# Altium PCB PCB1.PcbDoc (part 3 of 3)
Units mm, origin at the board's own origin, x right, y up, seen from the top; angles counter-clockwise.
Board outline 100 x 60 mm, 4 copper layers (Top Layer, GND, POWER, Bottom Layer), stack 1.592 mm thick; 134 components, 201 nets, 911 pads, 539 vias.
Unrouted connection lines stored in the file: 3.
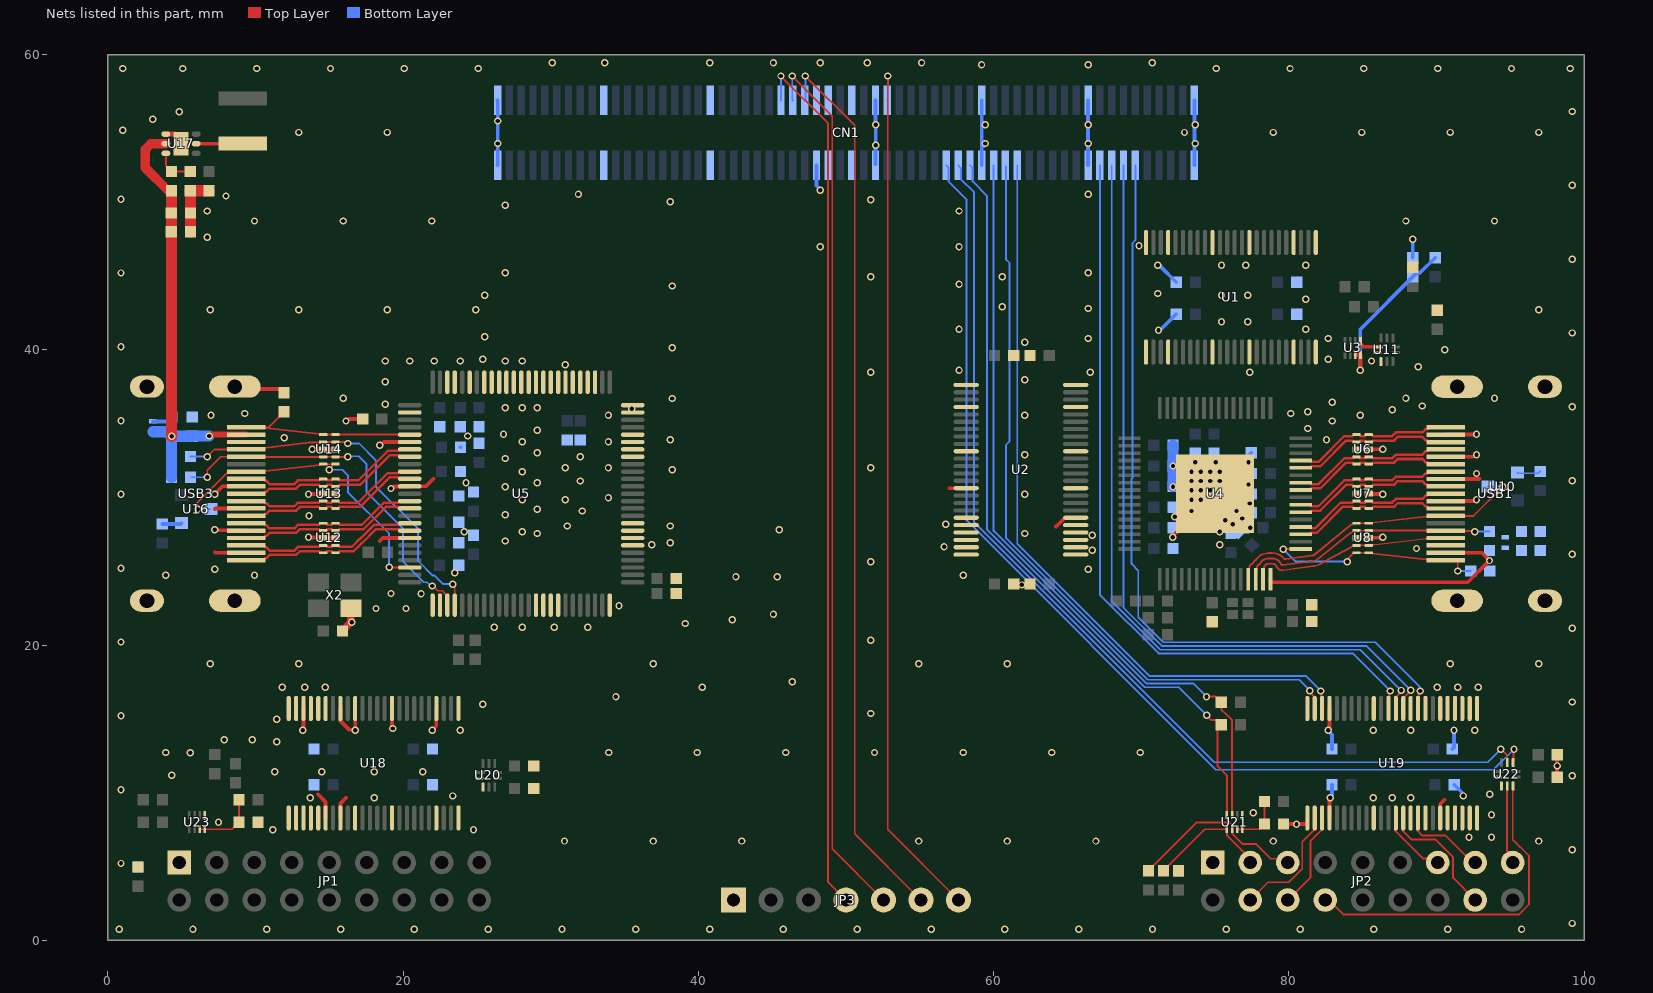
[diagram p5: the nets of this part, all layers, seen from the top]

## Via types
v1: diameter 0.5, hole 0.3, Top Layer to Bottom Layer, tented top, 493 vias
v2: diameter 0.5, hole 0.3, Top Layer to Bottom Layer, 46 vias

## Nets (pads, with @x,y where several pads share a name; then routed paths per layer and width w, separated by ;. In a path a pad name is that pad's centre, name@x,y a point inside that pad or via, vN(x,y) a via of type N, cw(c..) or ccw(c..) an arc to the next point about the centre after c; other vN are vias at no path point) (continued)
CAM2_D5_1V8: CN1.17 U19.37 | length 52.7
  Top Layer w0.127: U19.37@86.751,15.708 86.78,15.738 86.78,16.716 86.868,16.804 v1(86.868,16.891)
  Bottom Layer w0.127: CN1.17@67.201,52.497 67.201,23.408 71.178,19.431 84.328,19.431 v1(86.868,16.891)
CAM2_D6: JP2.13 U19.13 | length 4.6
  Top Layer w0.127: U19.13@87.244,8.23 87.18,8.166 87.18,7.449 89.077,5.552 89.798,5.552 JP2.13@90.08,5.27
CAM2_D6_1V8: CN1.15 U19.36 | length 53
  Top Layer w0.127: U19.36@87.249,15.708 87.249,16.467 87.621,16.839 v1(87.621,16.926)
  Bottom Layer w0.127: CN1.15@67.998,52.497 67.998,22.97 71.283,19.685 84.836,19.685 87.595,16.926 v1(87.621,16.926)
CAM2_D7: JP2.16 U19.14 | length 8.5
  Top Layer w0.127: U19.14@87.744,8.23 87.681,8.166 87.681,7.449 88.291,6.838 89.912,6.838 91.125,5.626 91.125,4.225 JP2.16@92.62,2.73
CAM2_D7_1V8: CN1.13 U19.35 | length 53.2
  Top Layer w0.127: U19.35@87.749,15.708 87.749,16.401 88.267,16.919 v1(88.267,16.942)
  Bottom Layer w0.127: CN1.13@68.799,52.497 68.799,22.529 71.388,19.939 85.244,19.939 88.241,16.942 v1(88.267,16.942)
CAM2_HREF: JP2.6 U19.3 | length 6.5
  Top Layer w0.127: JP2.6@79.92,2.73 81.469,4.279 81.469,6.736 82.245,7.512 U19.3@82.245,8.23
CAM2_HREF_1V8: CN1.31 U19.46 | length 51.6
  Top Layer w0.127: v1(82.169,16.891) 82.221,16.839 82.221,15.738 U19.46@82.25,15.708
  Bottom Layer w0.127: CN1.31@61.6,52.497 61.6,26.853 70.547,17.907 81.153,17.907 v1(82.169,16.891)
CAM2_PCLK: JP2.15 U19.16 | length 5.6
  Top Layer w0.127: U19.16@88.745,8.23 88.682,8.166 88.682,7.449 89.038,7.092 90.63,7.092 92.452,5.27 JP2.15@92.62,5.27
CAM2_PCLK_1V8: CN1.11 U19.33 | length 53.5
  Top Layer w0.127: U19.33@88.75,15.708 88.779,15.738 88.779,16.683 88.9,16.804 v1(88.9,16.891)
  Bottom Layer w0.127: CN1.11@69.599,52.497 69.599,47.424 69.407,47.232 69.407,31.316 69.342,31.251 69.342,25.496 69.797,25.041 69.797,21.889 71.494,20.193 85.852,20.193 88.843,17.202 88.843,16.948 v1(88.9,16.891)
CAM2_PWDN: JP2.17 U22.4 | length 5.4
  Top Layer w0.127: U22.4@94.792,10.449 94.767,10.424 94.767,6.062 95.16,5.669 JP2.17@95.16,5.27
CAM2_PWDN_1V8: CN1.41 U22.9 | length 68.5
  Top Layer w0.127: v1(94.361,12.954) 94.756,12.559 94.756,12.086 U22.9@94.792,12.049
  Bottom Layer w0.127: CN1.41@57.6,52.497 57.786,52.31 57.786,51.561 58.674,50.673 58.674,28.321 74.93,12.065 93.472,12.065 v1(94.361,12.954)
CAM2_RST: JP2.8 U22.5 | length 23.1
  Top Layer w0.127: JP2.8@82.46,2.984 83.705,1.739 95.57,1.739 96.266,2.435 96.266,5.715 95.167,6.814 95.167,10.424 U22.5@95.192,10.449
CAM2_RST_1V8: CN1.43 U22.8 | length 70.2
  Top Layer w0.127: U22.8@95.192,12.049 95.221,12.078 95.221,12.925 v1(95.25,12.954)
  Bottom Layer w0.127: CN1.43@56.8,52.497 56.949,52.347 56.949,51.382 58.166,50.165 58.166,28.448 75.057,11.557 93.853,11.557 v1(95.25,12.954)
CAM2_SCL: JP2.3 R27.1 U21.5 | length 8.1
  Top Layer w0.127: R27.1@71.501,4.714 71.818,5.032 71.818,5.047 74.291,7.52 U21.5@75.801,7.52 75.801,7.103 JP2.3@77.38,5.524
CAM2_SCL_1V8: CN1.39 R28.2 U21.4 | length 53
  Top Layer w0.127: v1(74.437,15.24) 74.755,14.923 75.106,14.923 R28.2@75.423,14.605 75.169,14.351 75.169,11.801 75.801,11.169 U21.4@75.801,8.48
  Bottom Layer w0.127: CN1.39@58.4,52.497 58.575,52.321 58.575,51.407 59.563,50.419 59.563,27.813 70.231,17.145 72.532,17.145 v1(74.437,15.24)
CAM2_SDA: JP2.5 R25.1 U21.6 | length 12.1
  Top Layer w0.127: R25.1@70.485,4.714 70.802,5.032 70.802,5.047 73.731,7.976 75.968,7.976 76.128,7.816 76.128,7.544 76.176,7.496 76.176,7.224 76.885,6.515 77.79,6.515 78.781,5.524 JP2.5@79.92,5.524
CAM2_SDA_1V8: CN1.35 R26.2 U21.3 | length 52.9
  Top Layer w0.127: v1@74.425,16.507 75.031,16.507 75.091,16.447 75.106,16.447 75.428,16.125 75.428,15.632 75.748,15.311 76.152,14.908 76.152,14.145 U21.3@76.152,8.48
  Bottom Layer w0.127: CN1.35@60,52.497 60,27.735 70.336,17.399 73.533,17.399 v1(74.422,16.51)
CAM2_VS: JP2.4 U19.2 | length 8.1
  Top Layer w0.127: JP2.4@77.38,2.73 78.586,3.936 79.987,3.936 80.911,4.86 80.911,6.678 81.745,7.512 U19.2@81.745,8.23
CAM2_VS_1v8: CN1.33 U19.47 | length 51.6
  Top Layer w0.127: v1(81.415,16.915) 81.415,16.814 81.549,16.681 81.549,16.668 81.75,16.467 U19.47@81.75,15.708
  Bottom Layer w0.127: CN1.33@60.833,52.428 60.833,46.137 61.087,45.883 61.087,33.807 60.833,33.553 60.833,27.261 70.441,17.653 80.69,17.653 81.415,16.928 v1(81.415,16.915)
GND: C1.1 C2.1 C3.2 C4.2 C5.1 C6.2 C7.1 C8.2 C9.1 C10.1 C11.1 C12.2 C13.1 C14.2 C15.1 C16.1 C17.2 C18.2 C19.2 C20.1 C21.2 C22.1 C23.2 C24.2 C25.2 C26.2 C27.2 C28.2 C29.2 C30.2 C31.2 C32.2 C33.2 C34.1 C35.1 C36.2 C37.1 C38.2 C39.1 C40.2 C41.1 C42.2 C43.1 C44.1 C45.2 C46.2 C47.2 C48.2 C49.1 C50.1 C51.1 C52.2 C53.1 C54.2 C55.2 C56.2 C57.2 C58.2 C59.1 C60.2 C61.2 C62.1 C63.2 C64.1 C65.2 C66.2 C67.1 C68.2 C69.2 CN1.1 CN1.2 CN1.19 CN1.20 CN1.37 CN1.38 CN1.55 CN1.56 CN1.65 CN1.66 CN1.83 CN1.84 CN1.101 CN1.102 CN1.119 CN1.120 JP1.1 JP2.1 JP3.1 R1.2 R13.1 R14.1 R16.1 R23.1 U1.1 U1.4 U1.10 U1.15 U1.21 U1.24 U1.25 U1.28 U1.34 U1.39 U1.45 U1.48 U2.1 U2.2 U2.3 U2.4 U2.5 U2.6 U2.10 U2.15 U2.21 U2.24 U2.25 U2.28 U2.34 U2.39 U2.43 U2.44 U2.45 U2.46 U2.47 U2.48 U3.1 U4.65 U5.3 U5.4 U5.5 U5.6 U5.7 U5.8 U5.9 U5.10 U5.11 U5.12 U5.13 U5.14 U5.15 U5.16 U5.17 U5.18 U5.20 U5.22 U5.23 U5.27 U5.31 U5.37 U5.44 U5.51 U5.52 U5.65 U5.66 U5.67 U5.68 U5.75 U5.81 U5.82 U5.83 U5.84 U5.93 U5.94 U5.95 U5.96 U5.99 U5.100 U6.3 U6.8 U7.3 U7.8 U8.3 U8.8 U9.2 U11.1 U11.2 U11.3 U12.3 U12.8 U13.3 U13.8 U14.3 U14.8 U15.2 U17.1 U17.7 U18.1 U18.2 U18.3 U18.4 U18.5 U18.6 U18.8 U18.10 U18.15 U18.21 U18.24 U18.25 U18.28 U18.34 U18.39 U18.41 U18.43 U18.44 U18.45 U18.46 U18.47 U18.48 U19.1 U19.4 U19.10 U19.15 U19.17 U19.19 U19.20 U19.21 U19.22 U19.23 U19.24 U19.25 U19.26 U19.27 U19.28 U19.29 U19.30 U19.32 U19.34 U19.39 U19.45 U19.48 U20.2 U20.3 U21.1 U22.2 U22.3 U23.1 USB1.2 USB1.5 USB1.8 USB1.11 USB1.17 USB1.20 USB1.21 USB1.22 USB1.23 USB3.2 USB3.5 USB3.8 USB3.11 USB3.17 USB3.20 USB3.21 USB3.22 USB3.23 X2.2 | length 115.9
  Top Layer w0.127: JP1.1@4.284,4.968 JP1.1@4.84,5.524
  Top Layer w0.254: U17.7@4.58,54.614 4.953,54.24 U17.7@4.953,53.964 ; 7.239,26.289 7.272,26.256 USB3.2@9.36,26.256 ; v1(7.239,27.813) 7.274,27.778 9.338,27.778 USB3.5@9.36,27.755 ; 7.239,29.21 7.285,29.256 USB3.8@9.36,29.256 ; v1(7.239,30.226) 7.767,30.754 USB3.11@9.36,30.754 ; USB3.20@8.601,37.506 8.754,37.353 11.684,37.353 R14.1@11.938,37.099 ; v1(13.208,14.224) 13.245,14.261 13.245,15.704 U18.46@13.25,15.708 ; v1(13.589,27.305) 13.614,27.28 14.557,27.28 U12.8@14.583,27.254 U12.3@15.418,27.254 ; v1(13.589,30.226) 13.603,30.24 14.569,30.24 U13.8@14.583,30.254 ; v1(13.843,33.274) 13.853,33.264 14.573,33.264 U14.8@14.583,33.254 U14.3@15.418,33.254 ; 14.224,9.891 14.746,9.368 14.746,8.296 U18.6@14.751,8.292 ; U18.8@15.75,8.292 15.754,8.296 15.754,9.277 16.129,9.652 ; U18.41@15.75,15.708 15.754,15.704 15.754,14.853 16.336,14.271 16.717,14.271 v1(16.764,14.224) 16.755,14.233 16.755,15.704 U18.39@16.75,15.708 ; v1(16.129,35.179) 16.196,35.179 16.322,35.306 R13.1@17.257,35.306 ; 18.415,27.051 18.618,27.254 U5.44@20.449,27.254 ; v1(18.415,33.528) 18.482,33.528 18.708,33.754 U5.31@20.449,33.754 ; v1(19.177,30.607) 19.244,30.607 19.382,30.746 20.44,30.746 U5.37@20.449,30.754 20.457,30.763 21.541,30.763 22.052,31.273 ; U18.34@19.25,15.708 19.25,14.458 19.304,14.404 v1(19.304,14.351) ; v1(21.971,14.224) 22.249,14.502 U18.28@22.249,15.708 ; 57.002,30.616 57.286,30.616 57.292,30.622 58.136,30.622 U2.39@58.141,30.627 ; C8.2@61.356,24.13 61.413,24.073 v1(61.919,24.073) ; v1@61.919,24.13 61.976,24.073 62.411,24.073 C7.1@62.469,24.13 ; 64.226,28.033 64.244,28.033 64.84,28.628 U2.6@65.557,28.628 ; v1(72.136,27.305) 72.183,27.352 72.183,27.437 73.406,28.66 v1(73.406,29.083) 74.041,29.718 v1(74.041,29.845) 74.045,29.849 74.123,29.849 74.676,30.402 v1(74.676,30.48) 74.139,31.017 74.139,31.115 v1(73.406,31.115) 73.025,30.734 v1(72.151,30.734) ; C64.1@79.644,7.874 v1(80.518,7.874) 81.238,7.874 81.249,7.886 U19.1@81.249,8.292 ; v1(82.677,14.224) 82.677,14.277 82.751,14.351 U19.45@82.751,15.708 ; U19.4@82.751,8.292 82.751,9.546 82.804,9.599 v1(82.804,9.652) ; U3.1@84.855,40.404 85.054,40.205 U11.1@86.039,40.205 ; U8.3@85.417,27.254 85.438,27.274 86.329,27.274 v1(86.36,27.305) ; U7.3@85.417,30.254 85.434,30.238 86.348,30.238 v1(86.36,30.226) ; U6.3@85.417,33.254 85.426,33.263 86.349,33.263 v1(86.36,33.274) ; U19.19@90.251,8.292 90.256,8.296 90.256,9.23 90.551,9.525 ; USB1.11@90.64,29.754 92.552,29.754 92.643,29.845 v1(92.71,29.845) ; USB1.8@90.64,31.252 92.902,31.252 92.911,31.261 ; USB1.5@90.64,32.753 92.504,32.753 92.643,32.893 v1(92.71,32.893) ; USB1.2@90.64,34.252 90.659,34.271 92.691,34.271 v1(92.71,34.29) ; C69.2@98.186,11.049 98.171,11.064 v1(98.171,11.811) 98.171,12.558 C68.2@98.186,12.573
  Top Layer w0.356: U17.1@3.924,54.614 U17.7@4.58,54.614
  Top Layer w0.508: C32.2@15.89,20.955 16.467,21.532 X2.2@16.467,22.492
  Top Layer w0.762: C49.1@5.588,47.995 5.588,50.759 R23.1@5.573,50.774 C51.1@6.858,50.773
  Bottom Layer w0.127: JP1.1@4.284,4.968 JP1.1@4.84,5.524
  Bottom Layer w0.254: U15.2@3.048,35.148 4.018,35.148 C28.2@4.318,35.448 ; C21.2@23.876,33.401 C21.2@23.891,33.401 ; CN1.119@26.401,52.497 26.408,52.504 26.408,53.967 v1(26.416,53.975) v1(26.416,55.499) 26.408,55.507 26.408,56.888 CN1.120@26.401,56.896 ; CN1.65@47.998,52.497 47.998,51.116 48.26,50.855 v1(48.26,50.8) ; CN1.55@51.999,52.568 52.005,52.573 52.005,53.842 v1(52.011,53.848) ; v1@51.999,53.848 52.011,53.86 v1(52.011,55.245) ; v1@51.999,55.245 52.005,55.251 52.005,56.89 CN1.56@51.999,56.896 ; CN1.37@59.2,52.497 CN1.38@59.2,56.896 ; 59.2,55.516 59.436,55.279 v1(59.436,55.245) ; v1@59.323,53.796 59.436,53.908 v1(59.436,53.975) ; CN1.19@66.401,52.497 CN1.20@66.401,56.896 ; v1(71.12,45.72) 71.167,45.673 71.279,45.673 C6.2@72.375,44.577 ; v1(71.167,41.322) 71.279,41.322 C5.1@72.375,42.418 ; CN1.1@73.599,52.497 CN1.2@73.599,56.896 ; v1(77.264,32.37) 77.264,32.83 C41.1@77.455,33.02 ; v1(82.677,14.224) 82.677,14.171 82.916,13.932 C61.2@82.916,12.954 ; v1(82.804,9.652) 82.804,9.705 82.916,9.817 C60.2@82.916,10.541 ; C3.2@88.392,46.243 v1(88.392,47.498) ; C63.2@91.074,12.954 91.186,13.066 v1(91.186,14.224) ; C62.1@91.201,10.541 91.783,9.959 91.783,9.817 v1(91.821,9.779)
  Bottom Layer w0.762: v1(72.151,30.734) v1(72.151,32.131) C48.2@72.151,33.528
  other v1: 0.762,0.762 5.762,0.762 10.762,0.762 15.762,0.762 20.762,0.762 25.762,0.762 30.762,0.762 35.762,0.762 40.762,0.762 45.762,0.762 50.762,0.762 55.762,0.762 60.762,0.762 65.762,0.762 70.762,0.762 75.762,0.762 80.762,0.762 85.762,0.762 90.762,0.762 95.762,0.762 99.187,1.143 0.889,5.207 99.187,6.143 92.202,6.985 93.726,6.985 11.176,7.493 24.765,7.493 7.493,8.001 93.726,8.509 77.597,8.636 13.716,9.652 18.034,9.652 85.725,9.652 86.995,9.652 88.265,9.652 23.368,9.779 93.599,9.906 0.889,10.207 99.187,11.143 4.318,11.176 11.303,11.43 14.478,11.43 18.034,11.43 21.336,11.43 5.588,12.7 11.43,13.462 7.874,13.589 9.779,13.589 23.876,14.224 85.725,14.224 88.265,14.224 92.583,14.224 11.43,14.986 0.889,15.207 51.689,15.367 25.4,16.002 99.187,16.143 34.417,16.51 11.811,17.145 13.335,17.145 14.732,17.145 40.259,17.145 90.043,17.145 91.44,17.145 92.837,17.145 46.355,17.526 0.889,20.207 51.689,20.32 99.187,21.143 26.162,21.209 28.067,21.209 30.226,21.209 32.512,21.209 39.116,21.463 16.525,21.537 42.291,21.717 45.085,22.098 18.161,22.479 20.193,22.479 34.624,22.653 21.214,23.47 19.177,23.495 42.545,24.638 45.339,24.638 23.495,24.892 7.239,25.146 66.421,25.146 0.889,25.207 51.689,25.654 99.187,26.143 66.675,26.416 88.646,26.543 56.642,26.67 36.83,26.797 75.311,26.797 38.1,26.924 26.924,27.051 66.675,27.432 29.083,27.559 62.103,27.559 24.13,27.686 28.067,27.686 75.311,27.686 45.466,27.813 77.397,27.94 31.115,28.067 38.1,28.067 56.769,28.194 76.2,28.194 75.692,28.448 76.835,28.575 72.263,28.702 13.625,28.766 26.924,28.829 32.131,29.083 76.454,29.083 29.083,29.21 77.343,29.591 28.067,29.845 30.988,29.845 73.406,29.845 33.909,29.972 0.889,30.207 62.103,30.226 73.406,30.48 74.041,30.48 26.924,30.734 77.264,30.876 24.257,30.988 29.083,30.988 32.004,31.115 74.041,31.115 74.676,31.115 75.311,31.115 99.187,31.143 92.71,31.623 28.067,31.75 73.406,31.75 74.041,31.75 74.676,31.75 75.311,31.75 38.227,31.877 30.988,32.004 33.909,32.004 51.689,32.004 73.66,32.385 75.057,32.385 26.924,32.639 32.004,32.766 62.103,32.893 29.083,33.02 28.067,33.782 33.909,33.782 38.1,33.909 82.55,33.909 11.938,34.036 24.384,34.163 26.797,34.29 29.083,34.544 81.28,34.671 82.931,35.179 0.889,35.207 6.985,35.56 33.909,35.56 62.103,35.56 84.836,35.56 9.271,35.687 80.137,35.687 81.28,35.814 86.995,35.941 35.488,35.995 26.924,36.068 28.067,36.068 29.083,36.068 99.187,36.143 89.027,36.195 18.796,36.322 82.931,36.449 38.227,36.703 18.796,37.846 62.103,37.973 51.689,38.481 66.548,38.481 77.343,38.481 57.658,38.608 88.773,38.862 30.988,38.989 18.796,39.243 20.447,39.243 22.098,39.243 23.876,39.243 26.924,39.243 28.067,39.243 85.598,39.243 25.4,39.37 82.677,39.37 90.551,40.005 38.227,40.132 0.889,40.207 62.103,40.513 66.421,40.767 82.677,40.767 25.527,40.894 99.187,41.143 57.658,41.402 81.153,41.402 75.438,41.91 77.216,41.91 66.421,42.799 60.579,42.926 81.153,43.434 25.527,43.688 75.438,43.688 77.216,43.688 71.12,43.815 38.227,44.323 57.658,44.45 51.689,44.958 60.579,44.958 0.889,45.207 26.924,45.212 66.421,45.212 75.438,45.72 77.089,45.72 81.153,45.72 99.187,46.143 48.26,46.99 57.658,46.99 69.848,47.05 6.731,47.625 6.731,49.403 57.658,49.403 26.924,49.784 38.1,50.038 51.689,50.165 0.889,50.207 8.001,50.419 31.877,50.546 66.421,50.546 99.187,51.143 66.421,53.975 73.66,53.975 1.016,54.864 66.421,55.245 73.66,55.245 3.048,55.626 4.826,56.134 99.187,56.143 1.016,59.055 5.08,59.055 10.08,59.055 15.08,59.055 20.08,59.055 25.08,59.055 75.08,59.055 80.08,59.055 85.08,59.055 90.08,59.055 95.08,59.055 99.06,59.055 59.182,59.309 66.421,59.309 30.099,59.436 33.655,59.436 40.767,59.436 45.085,59.436 48.26,59.436 51.435,59.436 55.118,59.436 70.739,59.436
  other v2: 30.931,6.725 36.931,6.725 42.931,6.725 54.931,6.725 60.931,6.725 66.931,6.725 78.931,6.725 96.931,6.725 3.931,12.725 33.931,12.725 39.931,12.725 45.931,12.725 51.931,12.725 57.931,12.725 63.931,12.725 69.931,12.725 6.931,18.725 12.931,18.725 36.931,18.725 54.931,18.725 60.931,18.725 90.931,18.725 96.931,18.725 3.931,24.725 9.931,24.725 57.931,24.725 15.931,36.725 87.931,36.725 93.931,36.725 6.931,42.725 12.931,42.725 18.931,42.725 24.931,42.725 96.931,42.725 9.931,48.725 15.931,48.725 21.931,48.725 87.931,48.725 93.931,48.725 12.931,54.725 18.931,54.725 72.931,54.725 78.931,54.725 84.931,54.725 90.931,54.725 96.931,54.725
HDMI_RX0_N: U4.6 U7.4 U7.7 USB1.9 | length 11
  Top Layer w0.17: U4.6@80.801,29.004 81.427,29.004 81.529,29.106 82.124,29.106 83.874,30.855 84.299,30.855 84.4,30.754 U7.7@84.583,30.754 84.765,30.754 84.866,30.855 85.134,30.855 85.235,30.754 U7.4@85.417,30.754 85.6,30.754 85.701,30.855 87.123,30.855 87.371,31.104 89.038,31.104 89.251,30.89 89.351,30.89 89.489,30.752 USB1.9@90.64,30.752
HDMI_RX0_P: U4.7 U7.5 U7.6 USB1.7 | length 11
  Top Layer w0.17: U4.7@80.801,29.505 81.427,29.505 81.529,29.403 82.001,29.403 83.751,31.153 84.299,31.153 84.4,31.254 U7.6@84.583,31.254 84.765,31.254 84.866,31.153 85.134,31.153 85.235,31.254 U7.5@85.417,31.254 85.6,31.254 85.701,31.153 86.999,31.153 87.248,31.401 89.038,31.401 89.251,31.614 89.351,31.614 89.489,31.753 USB1.7@90.64,31.753
HDMI_RX1_N: U4.9 U6.1 U6.10 USB1.6 | length 11
  Top Layer w0.17: U4.9@80.801,30.505 81.427,30.505 81.529,30.607 82.125,30.607 83.873,32.355 84.299,32.355 84.4,32.254 U6.10@84.583,32.254 84.765,32.254 84.866,32.355 85.134,32.355 85.235,32.254 U6.1@85.417,32.254 85.6,32.254 85.701,32.355 87.122,32.355 87.371,32.605 89.038,32.605 89.251,32.391 89.351,32.391 89.489,32.253 USB1.6@90.64,32.253
HDMI_RX1_P: U4.10 U6.2 U6.9 USB1.4 | length 11
  Top Layer w0.17: U4.10@80.801,31.006 81.427,31.006 81.529,30.904 82.002,30.904 83.75,32.653 84.299,32.653 84.4,32.754 U6.9@84.583,32.754 84.765,32.754 84.866,32.653 85.134,32.653 85.235,32.754 U6.2@85.417,32.754 85.6,32.754 85.701,32.653 86.999,32.653 87.248,32.902 89.038,32.902 89.251,33.115 89.351,33.115 89.489,33.254 USB1.4@90.64,33.254
HDMI_RX2_N: U4.12 U6.4 U6.7 USB1.3 | length 11
  Top Layer w0.17: U4.12@80.801,32.004 81.427,32.004 81.529,32.106 82.124,32.106 83.874,33.855 84.299,33.855 84.4,33.754 U6.7@84.583,33.754 84.765,33.754 84.866,33.855 85.134,33.855 85.235,33.754 U6.4@85.417,33.754 85.6,33.754 85.701,33.855 87.123,33.855 87.371,34.103 89.038,34.103 89.251,33.89 89.351,33.89 89.489,33.752 USB1.3@90.64,33.752
HDMI_RX2_P: U4.13 U6.5 U6.6 USB1.1 | length 11
  Top Layer w0.17: U4.13@80.801,32.504 81.427,32.504 81.529,32.403 82.001,32.403 83.751,34.153 84.299,34.153 84.4,34.254 U6.6@84.583,34.254 84.765,34.254 84.866,34.153 85.134,34.153 85.235,34.254 U6.5@85.417,34.254 85.6,34.254 85.701,34.153 87,34.153 87.248,34.401 89.038,34.401 89.251,34.614 89.351,34.614 89.489,34.752 USB1.1@90.64,34.752
HDMI_RX_5V: C4.1 C33.1 R7.2 R8.1 U4.64 U9.1 USB1.18 | length 18.8
  Top Layer w0.254: U4.64@78.752,24.455 78.752,24.318 78.813,24.257 92.121,24.257 v1(93.591,25.726) 93.064,26.254 USB1.18@90.64,26.254
HDMI_RX_CEC: U4.61 U8.5 U8.6 U10.3 USB1.13 | length 21.1
  Top Layer w0.127: U4.61@77.25,24.455 77.309,25.142 77.309,25.206 cw(c77.626,25.206) 77.489,25.492 ; 77.49,25.492 ccw(c77.434,25.607) 77.544,25.542 cw(c78.127,25.206) 77.753,25.765 ; 77.753,25.766 ccw(c77.682,25.871) 77.786,25.797 cw(c78.627,25.206) 77.927,25.959 cw(c78.627,25.206) 78.627,26.234 78.876,26.234 cw(c78.876,25.206) 79.644,25.89 79.67,25.861 ccw(c79.765,25.945) 79.765,25.818 ccw(c79.765,25.945) 79.781,25.819 81.595,26.066 ccw(c81.552,26.38) 81.629,26.073 ccw(c81.552,26.381) 81.754,26.136 84.116,28.087 cw(c84.35,27.804) 84.192,28.136 84.363,28.218 U8.6@84.583,28.254 U8.5@85.417,28.254 85.637,28.29 89.302,28.718 cw(c89.339,28.402) 89.339,28.72 89.403,28.72 USB1.13@90.64,28.753 92.507,28.753 v1(94.488,30.734)
  Bottom Layer w0.127: U10.3@93.488,30.734 v1(94.488,30.734)
HDMI_RX_DDC_SCL: R7.1 U4.62 U8.4 U8.7 USB1.15 | length 18
  Top Layer w0.127: U4.62@77.751,24.455 77.822,25.155 77.822,25.206 cw(c78.127,25.206) 78.003,25.484 ; 78.003,25.485 ccw(c77.962,25.577) 78.006,25.486 ccw(c77.962,25.577) 78.05,25.527 78.054,25.534 cw(c78.627,25.206) 78.177,25.689 ; 78.177,25.689 cw(c78.627,25.206) 78.627,25.866 78.876,25.866 cw(c78.876,25.206) 79.477,25.479 ccw(c79.57,25.521) 79.583,25.421 ; 79.583,25.421 81.644,25.701 ccw(c81.552,26.38) 81.719,25.715 ccw(c81.552,26.381) 81.98,25.844 84.095,27.532 84.156,27.581 84.424,27.717 U8.7@84.583,27.754 84.814,27.74 85.167,27.758 cw(c85.185,27.404) 85.185,27.759 U8.4@85.417,27.759 ; U8.4@85.417,27.754 U8.4@85.649,27.754 ; U8.4@85.417,27.754 U8.4@85.649,27.754 ; v1(92.583,27.686) 92.55,27.719 90.673,27.719 USB1.15@90.64,27.752 89.39,27.754 U8.4@85.649,27.754
  Bottom Layer w0.127: v1(92.583,27.686) 93.584,27.686 R7.1@93.599,27.701
HDMI_RX_DDC_SDA: U4.63 U8.2 U8.9 USB1.16 | length 13.8
  Top Layer w0.127: U4.63@78.251,24.455 78.322,25.155 78.322,25.206 cw(c78.627,25.206) 78.419,25.428 cw(c78.627,25.206) 78.627,25.511 78.876,25.511 cw(c78.876,25.206) 79.154,25.331 ccw(c79.477,25.479) 79.156,25.327 ccw(c79.57,25.521) 79.63,25.068 81.694,25.349 ccw(c81.552,26.38) 81.807,25.371 ccw(c81.552,26.381) 82.047,25.464 84.181,26.616 cw(c84.35,26.304) 84.186,26.618 84.351,26.705 U8.9@84.583,26.754 ; U8.9@84.583,26.749 84.815,26.749 ccw(c84.815,27.104) 84.826,26.749 85.186,26.761 U8.2@85.417,26.754 85.649,26.776 85.82,26.792 89.303,27.206 cw(c89.339,26.904) 89.339,27.209 89.39,27.209 USB1.16@90.64,27.252
HDMI_RX_HPD: R8.2 U4.1 U8.1 U8.10 USB1.19 | length 15.3
  Top Layer w0.127: v1(79.621,26.501) 79.623,26.503 80.8,26.503 U4.1@80.801,26.505 ; v1(83.947,25.654) 84.023,25.73 84.023,25.877 84.4,26.254 U8.10@84.583,26.254 U8.1@85.417,26.254 85.649,26.205 89.306,25.801 ccw(c89.339,26.104) 89.339,25.799 89.39,25.799 USB1.19@90.64,25.753 91.354,25.753 91.44,25.667 v1(91.44,25.019)
  Bottom Layer w0.127: v1(79.621,26.501) 80.469,25.654 v1(83.947,25.654) ; v1(91.44,25.019) R8.2@92.314,25.019
HDMI_RXC_N: U4.3 U7.1 U7.10 USB1.12 | length 11
  Top Layer w0.17: U4.3@80.801,27.506 81.427,27.506 81.528,27.606 81.887,27.606 83.637,29.355 84.299,29.355 84.4,29.254 U7.10@84.583,29.254 84.765,29.254 84.866,29.355 85.134,29.355 85.235,29.254 U7.1@85.417,29.254 85.6,29.254 85.701,29.355 87.122,29.355 87.372,29.605 89.038,29.605 89.251,29.392 89.351,29.392 89.489,29.253 USB1.12@90.64,29.253
HDMI_RXC_P: U4.4 U7.2 U7.9 USB1.10 | length 11
  Top Layer w0.17: U4.4@80.801,28.004 81.427,28.004 81.528,27.903 81.764,27.903 83.513,29.653 84.299,29.653 84.4,29.754 U7.9@84.583,29.754 84.765,29.754 84.866,29.653 85.134,29.653 85.235,29.754 U7.2@85.417,29.754 85.6,29.754 85.701,29.653 86.999,29.653 87.248,29.902 89.038,29.902 89.251,30.116 89.351,30.116 89.489,30.254 USB1.10@90.64,30.254
HDMI_TX0_N: U5.35 U13.2 U13.9 USB3.9 | length 12.4
  Top Layer w0.17: USB3.9@9.36,29.756 10.511,29.756 10.649,29.618 10.749,29.618 10.962,29.404 12.629,29.404 12.877,29.653 14.299,29.653 14.4,29.754 U13.9@14.583,29.754 14.765,29.754 14.866,29.653 15.134,29.653 15.235,29.754 U13.2@15.418,29.754 15.6,29.754 15.701,29.653 16.958,29.653 18.959,31.654 19.662,31.654 19.763,31.755 U5.35@20.449,31.755
HDMI_TX0_P: U5.36 U13.1 U13.10 USB3.7 | length 12.4
  Top Layer w0.17: USB3.7@9.36,28.755 10.511,28.755 10.649,28.894 10.749,28.894 10.962,29.107 12.752,29.107 13.001,29.355 14.299,29.355 14.4,29.254 U13.10@14.583,29.254 14.765,29.254 14.866,29.355 15.134,29.355 15.235,29.254 U13.1@15.418,29.254 15.6,29.254 15.701,29.355 17.081,29.355 19.082,31.356 19.662,31.356 19.763,31.255 U5.36@20.449,31.255
HDMI_TX1_N: U5.39 U12.5 U12.6 USB3.6 | length 12.2
  Top Layer w0.17: USB3.6@9.36,28.255 10.511,28.255 10.649,28.117 10.749,28.117 10.962,27.903 12.629,27.903 12.878,28.153 14.299,28.153 14.4,28.254 U12.6@14.583,28.254 14.765,28.254 14.866,28.153 15.134,28.153 15.235,28.254 U12.5@15.418,28.254 15.6,28.254 15.701,28.153 17.208,28.153 18.709,29.653 19.663,29.653 19.763,29.754 U5.39@20.449,29.754
HDMI_TX1_P: U5.40 U12.4 U12.7 USB3.4 | length 12.2
  Top Layer w0.17: USB3.4@9.36,27.254 10.511,27.254 10.649,27.393 10.749,27.393 10.962,27.606 12.752,27.606 13.001,27.855 14.299,27.855 14.4,27.754 U12.7@14.583,27.754 14.765,27.754 14.866,27.855 15.134,27.855 15.235,27.754 U12.4@15.418,27.754 15.6,27.754 15.701,27.855 17.331,27.855 18.832,29.356 19.663,29.356 19.763,29.256 U5.40@20.449,29.256
HDMI_TX2_N: U5.42 U12.2 U12.9 USB3.3 | length 12.2
  Top Layer w0.17: USB3.3@9.36,26.756 10.511,26.756 10.649,26.618 10.749,26.618 10.962,26.405 12.629,26.405 12.877,26.653 14.299,26.653 14.4,26.754 U12.9@14.583,26.754 14.765,26.754 14.866,26.653 15.134,26.653 15.235,26.754 U12.2@15.418,26.754 15.6,26.754 15.701,26.653 16.519,26.653 17.046,27.179 17.076,27.179 18.05,28.153 19.662,28.153 19.763,28.255 U5.42@20.449,28.255
HDMI_TX2_P: U5.43 U12.1 U12.10 USB3.1 | length 12.2
  Top Layer w0.17: USB3.1@9.36,25.756 10.511,25.756 10.649,25.894 10.749,25.894 10.962,26.107 12.752,26.107 13,26.355 14.299,26.355 14.4,26.254 U12.10@14.583,26.254 14.765,26.254 14.866,26.355 15.134,26.355 15.235,26.254 U12.1@15.418,26.254 15.6,26.254 15.701,26.355 16.642,26.355 17.169,26.882 17.199,26.882 18.173,27.856 19.662,27.856 19.763,27.755 U5.43@20.449,27.755
HDMI_TX_5V: C27.1 C28.1 C49.2 C50.2 R15.1 R17.1 R22.1 U15.1 U17.2 USB3.18 | length 31.1
  Top Layer w0.406: v1(6.858,34.163) 6.883,34.163 6.975,34.255 USB3.18@9.36,34.255
  Top Layer w0.635: U17.2@3.924,53.964 2.91,53.964 2.54,53.594 2.54,52.324 4.027,50.837 4.239,50.837 R22.1@4.303,50.774
  Top Layer w0.762: R22.1@4.31,50.766 4.31,49.265 4.31,47.995 4.31,34.155 v1(4.318,34.148)
  Bottom Layer w0.762: U15.1@3.048,34.448 4.018,34.448 v1(4.318,34.148) ; R15.1@4.303,31.369 R17.1@4.303,32.766 4.303,34.133 v1(4.318,34.148) ; v1(6.858,34.163) 5.73,34.163 C27.1@5.715,34.148 v1(4.318,34.148)
HDMI_TX_CEC: U5.48 U14.1 U14.10 U16.3 USB3.13 | length 22.4
  Top Layer w0.102: v1(6.096,29.21) 6.042,29.264 6.042,29.638 8.06,31.656 9.261,31.656 USB3.13@9.36,31.755 10.61,31.801 10.661,31.801 ccw(c10.661,32.106) 10.694,31.803 ; U14.10@14.351,32.205 U14.10@14.583,32.254 U14.1@15.318,32.254 ; v1(14.986,31.877) 15.212,32.103 15.212,32.205 15.261,32.254 U14.1@15.318,32.254 ; U14.1@15.418,32.254 U14.1@15.318,32.254
  Top Layer w0.127: 10.694,31.803 U14.10@14.351,32.205 ; v1(19.05,25.273) 19.059,25.264 20.44,25.264 U5.48@20.449,25.255
  Bottom Layer w0.102: v1(6.096,29.21) U16.3@6.985,29.21
  Bottom Layer w0.127: v1(14.986,31.877) 15.875,31.877 16.256,31.496 16.256,30.353 19.05,27.559 v1(19.05,25.273)
HDMI_TX_HPD: R14.2 U5.30 U14.5 U14.6 USB3.19 | length 14.1
  Top Layer w0.127: R14.2@11.938,35.799 10.894,34.755 USB3.19@9.36,34.755 10.61,34.709 10.661,34.709 cw(c10.661,34.404) 10.694,34.707 14.351,34.303 U14.6@14.583,34.254 U14.5@15.418,34.254 15.649,34.255 U5.30@20.449,34.255
HDMI_TX_SCL: R15.2 U5.53 U14.2 U14.9 USB3.15 | length 24
  Top Layer w0.102: v1(6.731,31.369) 6.731,31.833 7.654,32.756 USB3.15@9.36,32.756 ; U14.9@14.35,32.749 15.186,32.749 15.417,32.748 U14.2@15.419,32.749 ; v1@16.239,32.749 v1(16.256,32.766) ; v1(21.971,24.003) 22.032,24.003 22.352,23.683 22.634,23.683 22.993,23.324 U5.53@22.993,23.042 ; U5.53@22.993,22.711 U5.53@22.999,22.705
  Top Layer w0.127: USB3.15@10.61,32.749 U14.9@14.35,32.749 ; U14.2@15.419,32.749 v1@16.239,32.749 ; U5.53@22.993,22.711 U5.53@22.993,23.042
  Bottom Layer w0.102: R15.2@5.603,31.369 v1(6.731,31.369)
  Bottom Layer w0.127: v1(16.256,32.766) 16.279,32.789 16.995,32.789 17.526,32.258 17.526,30.353 19.999,27.88 19.999,25.644 21.386,24.257 21.616,24.257 21.87,24.003 v1(21.971,24.003)
HDMI_TX_SDA: R17.2 U5.54 U14.4 U14.7 USB3.16 | length 25.8
  Top Layer w0.102: v1(23.368,24.13) v1@23.499,23.999
  Top Layer w0.127: v1(6.731,32.766) 7.221,33.256 USB3.16@9.36,33.256 10.597,33.343 13.661,33.714 14.363,33.717 U14.7@14.583,33.754 U14.4@15.418,33.754 16.07,33.754 16.169,33.655 v1(16.256,33.655) ; U5.54@23.499,22.705 v1@23.499,23.999
  Bottom Layer w0.127: R17.2@5.603,32.766 v1(6.731,32.766) ; v1(16.256,33.655) 17.018,33.655 18.161,32.512 18.161,30.734 21.01,27.885 21.01,25.696 22.004,24.702 22.131,24.702 22.703,24.13 v1(23.368,24.13)
HDMI_TXC_N: U5.32 U13.5 U13.6 USB3.12 | length 12.4
  Top Layer w0.17: USB3.12@9.36,31.255 10.511,31.255 10.649,31.116 10.749,31.116 10.962,30.903 12.628,30.903 12.878,31.153 14.299,31.153 14.4,31.254 U13.6@14.583,31.254 14.765,31.254 14.866,31.153 15.134,31.153 15.235,31.254 U13.5@15.418,31.254 15.6,31.254 15.701,31.153 16.958,31.153 18.959,33.153 19.663,33.153 19.763,33.254 U5.32@20.449,33.254
HDMI_TXC_P: U5.33 U13.4 U13.7 USB3.10 | length 12.4
  Top Layer w0.17: USB3.10@9.36,30.254 10.511,30.254 10.649,30.392 10.749,30.392 10.962,30.606 12.752,30.606 13.001,30.855 14.299,30.855 14.4,30.754 U13.7@14.583,30.754 14.765,30.754 14.866,30.855 15.134,30.855 15.235,30.754 U13.4@15.418,30.754 15.6,30.754 15.701,30.855 17.081,30.855 19.082,32.856 19.663,32.856 19.763,32.756 U5.33@20.449,32.756
IO0: CN1.54 JP3.7 | length 59.5
  Top Layer w0.127: v1(52.832,58.547) 52.832,7.518 JP3.7@57.62,2.73
  Bottom Layer w0.127: CN1.54@52.799,56.896 52.832,56.929 v1(52.832,58.547)
IO1: CN1.68 JP3.6 | length 60.7
  Top Layer w0.127: v1(47.244,58.547) 50.59,55.201 50.59,7.219 JP3.6@55.08,2.73
  Bottom Layer w0.127: CN1.68@47.201,56.896 47.244,56.939 v1(47.244,58.547)
IO2: CN1.70 JP3.5 | length 60
  Top Layer w0.127: v1(46.355,58.547) 49.066,55.836 49.066,6.203 JP3.5@52.54,2.73
  Bottom Layer w0.127: v1(46.355,58.547) 46.355,56.942 CN1.70@46.401,56.896
IO3: CN1.72 JP3.4 | length 59.3
  Top Layer w0.127: v1(45.593,58.547) 48.768,55.372 48.768,3.962 JP3.4@50,2.73
  Bottom Layer w0.127: v1(45.593,58.547) 45.593,56.904 CN1.72@45.601,56.896
NC: CN1.59 CN1.60 CN1.63 CN1.64
NetC3_1: C3.1 R2.1 U3.7 U3.8 | length 11.3
  Top Layer w0.254: U3.7@84.503,39.652 U3.8@84.854,39.652 84.854,38.626 v1(84.836,38.608)
  Bottom Layer w0.254: v1(84.836,38.608) 84.836,41.387 88.646,45.197 88.87,45.197 R2.1@89.916,46.243
NetC64_2: C64.2 R24.1 U21.7 U21.8 | length 3.5
  Top Layer w0.127: U21.7@76.502,7.52 U21.8@76.853,7.52 77.99,7.52 C64.2@78.344,7.874 R24.1@78.344,9.398
NetC67_2: C67.2 R29.1 U23.7 U23.8 | length 4.4
  Top Layer w0.127: U23.7@6.223,7.52 U23.8@6.574,7.52 8.394,7.52 C67.2@8.875,8.001 R29.1@8.875,9.525
NetL1_2: L1.2 U17.5 | length 3.2
  Top Layer w0.254: U17.5@5.982,53.964 9.142,53.964 L1.2@9.144,53.962
NetR11_1: R11.1 U10.1 | length 1.6
  Bottom Layer w0.127: U10.1@95.488,31.684 95.534,31.638 96.901,31.638 R11.1@97.028,31.765
NetR20_1: R20.1 U16.1 | length 1.3
  Bottom Layer w0.254: R20.1@3.683,28.209 4.934,28.209 U16.1@4.985,28.26
NetR22_2: R22.2 R23.2 U17.3 | length 2.7
  Top Layer w0.127: U17.3@3.924,53.313 3.924,52.452 R22.2@4.303,52.074 R23.2@5.573,52.074
pads on no net: JP1.18 JP2.18 U4.48 U4.49 U4.50 U4.51 U5.46 U10.2 U16.2 USB1.14 USB3.14 X1.2 X1.4

## Polygon pours and split planes (outlines as drawn)
GND on Bottom Layer "BOTTOM_GND" (solid, remove dead copper, pour order 4): 0,0 0,60 100,60 100,0
GND on Bottom Layer "TOP_GND" (solid, remove dead copper, pour order 3): 0,0 0,60 100,60 100,0
GND on Top Layer "TOP_GND" (solid, remove dead copper, pour order 2): 0,0 100,0 100,60 0,60
1V8 on POWER (split plane): 84.313,52.21 84.316,52.196 84.313,52.182 84.313,49.162 84.323,49.112 84.351,49.07 84.986,48.435 85.028,48.407 85.077,48.397 88.58,48.397 89.025,47.952 89.025,47.638 89.025,43.021 76.185,43.021 70.485,43.021 70.435,43.011 70.393,42.983 70.365,42.941 70.355,42.892 70.356,34.191 70.356,33.528 70.365,33.478 70.393,33.436 70.435,33.408 70.485,33.399 71.695,33.399 71.744,33.408 71.786,33.436 73.554,35.204 74.512,35.204 74.512,34.036 74.522,33.986 74.55,33.944 74.592,33.916 74.642,33.907 77.581,33.907 77.631,33.916 77.673,33.944 78.651,34.923 79.881,34.923 79.881,33.26 78.902,32.282 78.874,32.239 78.865,32.19 78.865,28.448 78.874,28.398 78.902,28.356 80.236,27.023 80.236,24.156 80.246,24.106 80.274,24.064 80.316,24.036 80.365,24.026 82.675,24.026 82.675,20.701 82.684,20.651 82.712,20.609 82.754,20.581 82.804,20.572 86.687,20.572 89.951,17.307 89.993,17.279 90.043,17.27 96.01,17.27 96.01,14.986 96.01,13.589 96.019,13.539 96.047,13.497 96.089,13.469 96.139,13.46 96.772,13.46 96.772,12.067 93.599,12.067 93.549,12.058 93.507,12.03 92.402,10.924 10.414,10.924 10.364,10.915 10.322,10.887 7.947,8.511 5.336,8.511 5.336,10.868 6.569,12.1 6.597,12.142 6.606,12.192 6.606,13.333 11.43,13.333 11.48,13.342 11.522,13.37 11.55,13.412 11.559,13.462 11.559,16.097 11.559,17.016 14.732,17.016 14.782,17.025 14.824,17.053 14.852,17.095 14.861,17.145 14.861,17.726 15.421,18.286 16.827,18.286 16.877,18.295 16.919,18.323 16.947,18.365 16.957,18.415 16.957,21.114 16.947,21.163 16.919,21.205 16.877,21.233 16.827,21.243 14.353,21.243 14.353,22.225 14.353,25.092 15.865,26.604 20.574,26.604 20.624,26.614 20.666,26.642 20.694,26.684 20.703,26.733 20.703,31.496 20.703,39.876 24.765,39.876 24.815,39.885 24.857,39.913 24.885,39.955 24.894,40.005 24.894,54.608 48.258,54.608 48.258,53.34 48.258,52.832 48.258,51.308 48.267,51.258 48.295,51.216 48.337,51.188 48.387,51.179 50.419,51.179 50.469,51.188 50.511,51.216 50.539,51.258 50.548,51.308 50.548,59.49 84.313,59.49
3V3 on POWER (split plane): 303 vertices, not listed, extent 0.51,0.51 99.49,59.49
GND on GND (split plane): 99.49,0.51 0.51,0.51 0.51,59.49 99.49,59.49

## Other copper
Top Layer:
  rectangle net 3V3: 6.243,51.435 8.509,53.313
  rectangle net GND: 84.321,30.083 85.666,30.416
  rectangle net GND: 84.309,33.068 85.674,33.435
  rectangle net GND: 84.324,27.078 85.663,27.41
  rectangle net GND: 34.798,35.814 36.322,36.322
  rectangle net GND: 34.831,32.702 36.281,34.358
  rectangle net GND: 14.328,30.075 15.637,30.433
  rectangle net 1V8: 24.859,11.303 25.527,12.319
  rectangle net 1V8: 84.387,41.015 85.217,42.291
  rectangle net 1V8: 84.709,43.561 85.217,43.942
  rectangle net 1V8: 85.105,40.513 86.36,44.069
  rectangle net 1V8: 6.116,8.875 8.353,11.049
  rectangle net 1V8: 93.853,11.43 94.488,12.319
  rectangle net 1V8: 19.614,36.103 22.66,38.608
  region net GND: 69.827,47.684 70.262,48.118 70.358,48.118 70.358,46.527 70.246,46.416 69.868,46.416
  region net 1V8: 37.592,23.114 37.592,24.892 34.798,24.892 34.798,23.114
Bottom Layer:
  rectangle net HDMI_RX_5V: 93.218,24.638 97.409,26.797
  rectangle net 1V8: 50.8,51.435 51.562,57.912
  rectangle net 1V8: 30.734,34.798 32.385,36.576
  rectangle net 1V8: 22.098,35.687 25.527,36.576
  rectangle net 3V3: 49.251,51.435 49.962,57.912
  rectangle net 3V3: 22.642,26.147 24.765,26.416
  rectangle net 3V3: 21.463,25.943 22.965,27.305
  region net 1V8: 20.955,35.306 21.082,35.179 21.082,35.033 21.008,34.96
  region net 1V8: 21.082,35.179 20.955,35.306 20.955,36.576 22.137,36.576 22.21,36.503
  region net 1V8: 76.441,26.654 76.853,26.654 76.965,26.766 77.5,26.231 77.5,26.228 76.965,25.908 76.442,25.892
  region net 1V8: 78.629,27.559 78.232,26.924 78.039,26.767 78.032,26.767 77.501,27.297 77.915,27.711 78.018,27.711
  region net 1V8: 22.733,24.511 22.606,24.511 22.098,25.019 22.301,25.222 22.642,25.222
  region net HDMI_TX_5V: 2.667,34.417 2.667,30.988 3.937,30.988 3.937,34.29
POWER (plane layer: these items are gaps in the copper):
  lines w0.254: 84.442,52.182 84.442,49.162 85.077,48.527 85.62,48.527 87.976,48.527 88.633,48.527 89.154,48.006 89.154,47.638 89.154,42.892 85.759,42.892 76.185,42.892 70.485,42.892 70.485,34.191 70.485,33.528 71.695,33.528 73.5,35.334 74.642,35.334 74.642,34.036 77.581,34.036 78.597,35.052 80.01,35.052 80.01,33.206 78.994,32.19 78.994,28.448 80.365,27.077 80.365,24.156 82.804,24.156 82.804,20.701 86.741,20.701 90.043,17.399 96.139,17.399 96.139,14.986 96.139,13.589 96.901,13.589 96.901,11.938 93.599,11.938 92.456,10.795 10.414,10.795 8.001,8.382 5.207,8.382 5.207,10.922 6.477,12.192 6.477,13.462 7.62,13.462 11.43,13.462 11.43,16.097 11.43,17.145 14.732,17.145 14.732,17.78 15.367,18.415 16.827,18.415 16.827,21.114 14.224,21.114 14.224,22.225 14.224,25.146 15.811,26.733 20.574,26.733 20.574,31.496 20.574,40.005 24.765,40.005 24.765,54.737 48.387,54.737 48.387,53.34 48.387,52.832 48.387,51.308 50.419,51.308 50.419,60 84.349,60 84.442,59.907 84.442,52.21

## Silkscreen, mask and mechanical layers (free items; w line width, h text height)
Mechanical 6:
  the board outline again, w0.1

## Text inside footprints (layer, text, board x,y; h text height)
JP1: Top Overlay "17" at 26.938,4.635 h0.51; Top Overlay "18" at 26.938,1.841 h0.51; Top Overlay "1" at 3.048,5.334 h0.51; Top Overlay "2" at 2.921,1.651 h0.51
JP2: Top Overlay "17" at 96.938,4.635 h0.51; Top Overlay "18" at 96.938,2.095 h0.51; Top Overlay "1" at 72.771,4.826 h0.51; Top Overlay "2" at 72.644,1.905 h0.51